# EAGLE board LogicShrimp-v2a (EAGLE 5.11)
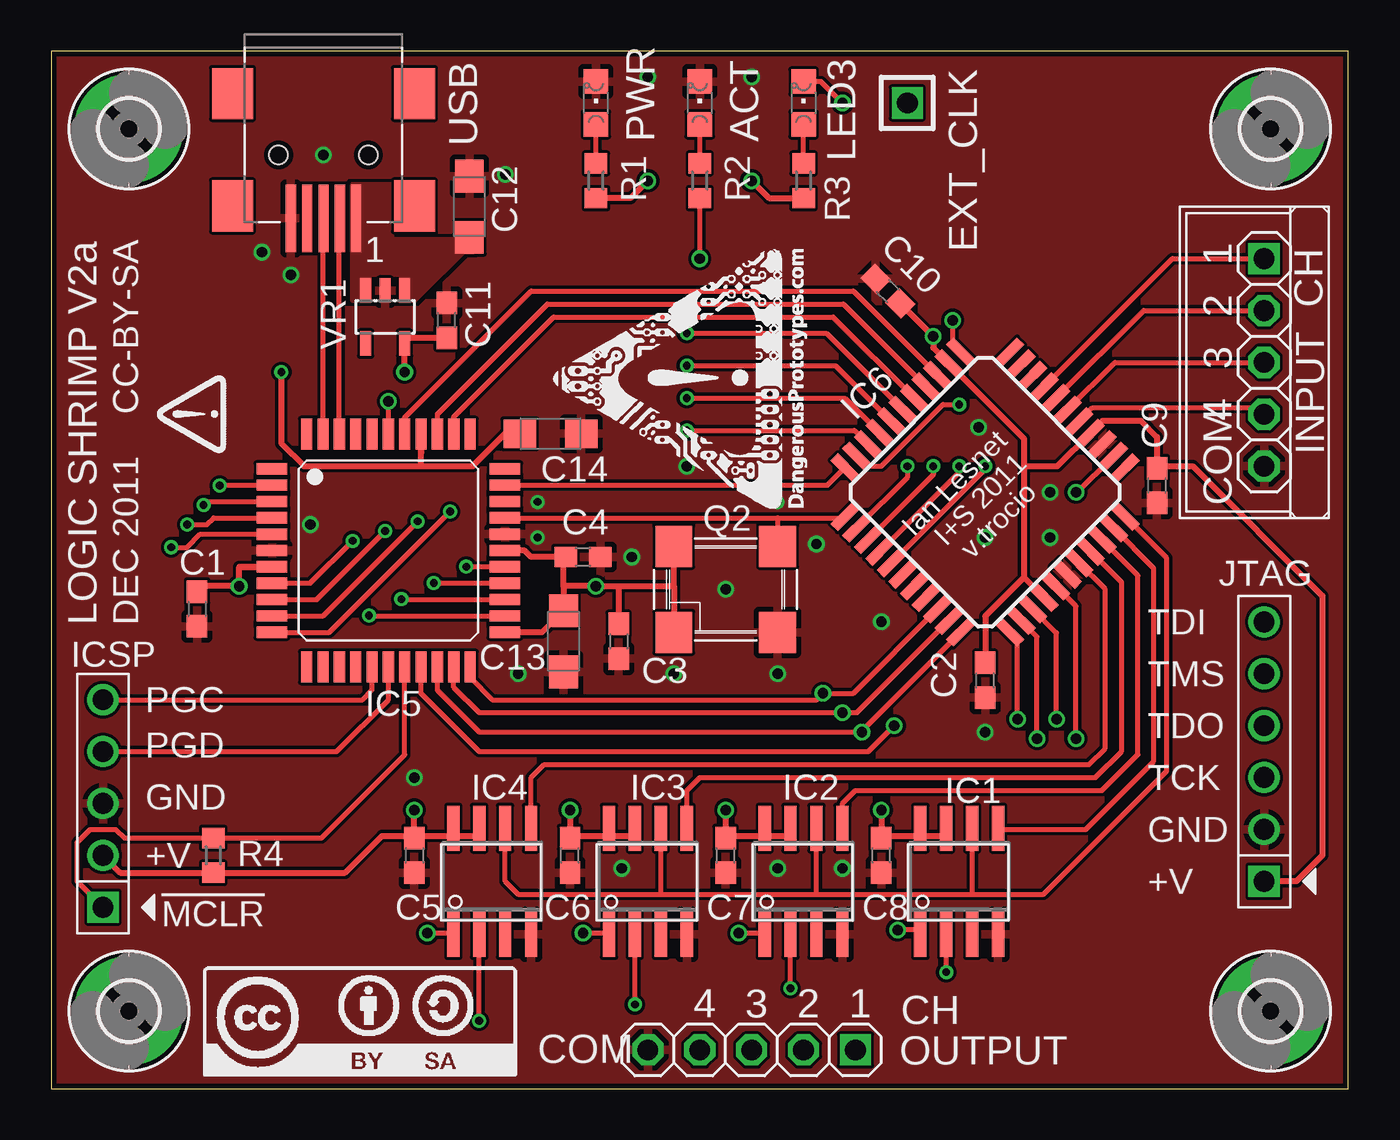
[diagram p0: board, top side]
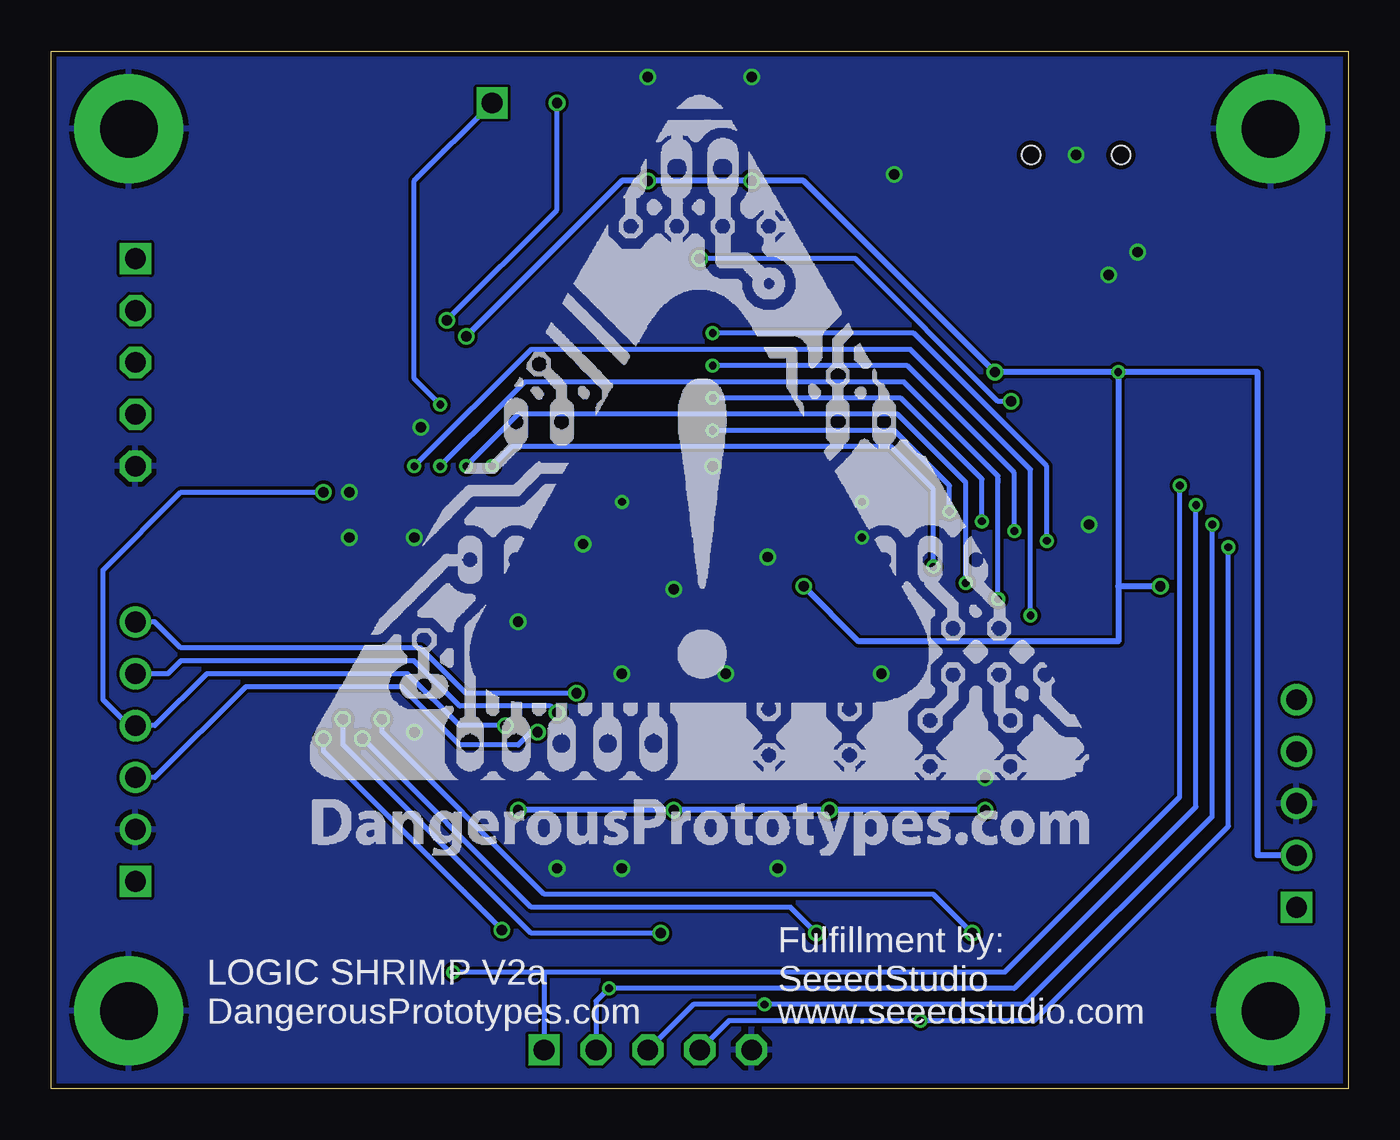
[diagram p1: board, bottom side, seen from below]

Size 63.5 x 50.8 mm. Coordinates in mm from the lower left corner, seen from the top.
Outline: 0,0 63.5,0 63.5,50.8 0,50.79 0,0
Copper layers (1*16): Top 0.035mm / dielectric 1.5mm / Bottom 0.035mm
Design rules "Fusion_eagle_rule_v1.1": minimum track width 6mil, minimum drill 12mil, track to track 6mil, track to pad 6mil, pad to pad 6mil, via to via 6mil, smd to smd 0mil, copper to edge 10mil, drill to drill 10mil, minimum pad ring 10mil, minimum via ring 6mil, stop-mask expansion 2mil, vias tented up to drill 100mil, thermal gap 10mil

## Footprints (pad centres in the part's own frame; a part is rotated, then mirrored left to right if it is on the bottom)
C0603 = smd 1.1 x 1: 1 -0.85,0; 2 0.85,0
SMC_A = smd 1.6 x 1.4: + -1.5,0; - 1.5,0
1X01 = drill 1.016 square: 1 0,0
2,8-PAD = drill 2.8 pad 5.334 round: B2,8 0,0
SOIC8 = smd 0.6 x 2.2: 1 -1.905,-2.6; 2 -0.635,-2.6; 3 0.635,-2.6; 4 1.905,-2.6; 5 1.905,2.6; 6 0.635,2.6; 7 -0.635,2.6; 8 -1.905,2.6
TQFP44 = smd 0.55 x 1.5: P1 -4,-5.7; P2 -3.2,-5.7; P3 -2.4,-5.7; P4 -1.6,-5.7; P5 -0.8,-5.7; P6 0,-5.7; P7 0.8,-5.7; P8 1.6,-5.7; P9 2.4,-5.7; P10 3.2,-5.7; P11 4,-5.7; P23 4,5.7; P24 3.2,5.7; P25 2.4,5.7; P26 1.6,5.7; P27 0.8,5.7; P28 0,5.7; P29 -0.8,5.7; P30 -1.6,5.7; P31 -2.4,5.7; P32 -3.2,5.7; P33 -4,5.7 | smd 1.5 x 0.55: P12 5.7,-4; P13 5.7,-3.2; P14 5.7,-2.4; P15 5.7,-1.6; P16 5.7,-0.8; P17 5.7,0; P18 5.7,0.8; P19 5.7,1.6; P20 5.7,2.4; P21 5.7,3.2; P22 5.7,4; P34 -5.7,4; P35 -5.7,3.2; P36 -5.7,2.4; P37 -5.7,1.6; P38 -5.7,0.8; P39 -5.7,0; P40 -5.7,-0.8; P41 -5.7,-1.6; P42 -5.7,-2.4; P43 -5.7,-3.2; P44 -5.7,-4
VQ44 = smd 1.5 x 0.5: 1 -5.7,4; 2 -5.7,3.2; 3 -5.7,2.4; 4 -5.7,1.6; 5 -5.7,0.8; 6 -5.7,0; 7 -5.7,-0.8; 8 -5.7,-1.6; 9 -5.7,-2.4; 10 -5.7,-3.2; 11 -5.7,-4; 23 5.7,-4; 24 5.7,-3.2; 25 5.7,-2.4; 26 5.7,-1.6; 27 5.7,-0.8; 28 5.7,0; 29 5.7,0.8; 30 5.7,1.6; 31 5.7,2.4; 32 5.7,3.2; 33 5.7,4 | smd 0.5 x 1.5: 12 -4,-5.7; 13 -3.2,-5.7; 14 -2.4,-5.7; 15 -1.6,-5.7; 16 -0.8,-5.7; 17 0,-5.7; 18 0.8,-5.7; 19 1.6,-5.7; 20 2.4,-5.7; 21 3.2,-5.7; 22 4,-5.7; 34 4,5.7; 35 3.2,5.7; 36 2.4,5.7; 37 1.6,5.7; 38 0.8,5.7; 39 0,5.7; 40 -0.8,5.7; 41 -1.6,5.7; 42 -2.4,5.7; 43 -3.2,5.7; 44 -4,5.7
HEADER_PRG_1X05 = drill 1.016 square: 1 -5.08,0 | drill 1.016 round: 2 -2.54,0; 3 0,0; 4 2.54,0; 5 5.08,0
1X05-S = drill 1.016 square: 1 -5.08,0 | drill 1.016 octagon: 2 -2.54,0; 3 0,0; 4 2.54,0; 5 5.08,0
HEADER_PRG_1X06 = drill 1.016 square: 1 -6.35,0 | drill 1.016 round: 2 -3.81,0; 3 -1.27,0; 4 1.27,0; 5 3.81,0; 6 6.35,0
LED-805 = smd 1.2 x 1.2: A 0,-1.05; C 0,1.05
OSCILLATOR_7X5_SMD = smd 1.8 x 2: 1 -2.54,-2.1; 2 2.54,-2.1; 3 2.54,2.1; 4 -2.54,2.1
R0603 = smd 1 x 1.1: 1 -0.85,0; 2 0.85,0
CONN_USB_MINI-B = smd 2 x 2.5: BODY@1 -4.45,2.5; BODY@2 4.45,2.5; BODY@3 4.45,-3; BODY@4 -4.45,-3 | smd 0.5 x 3.3: D+ 0,3.1; D- -0.8,3.1; GND 1.6,3.1; ID 0.8,3.1; VUSB -1.6,3.1 | hole 0.9: -2.2,0; 2.2,0
SOT-23-5 = smd 0.55 x 1.2: 1 -0.95,-1.3; 2 0,-1.3; 3 0.95,-1.3; 4 0.95,1.3; 5 -0.95,1.3

## Placement (x,y rotation side)
C1  0.1uF  [C0603]  7.14,23.5 270 top
C2  0.1uF  [C0603]  45.72,20 90 top
C3  0.1uF  [C0603]  27.78,21.91 270 top
C4  0.1uF  [C0603]  26.04,26.04 0 top
C5  0.1uF  [C0603]  17.78,11.43 270 top
C6  0.1uF  [C0603]  25.4,11.43 90 top
C7  0.1uF  [C0603]  33.02,11.43 90 top
C8  0.1uF  [C0603]  40.64,11.43 90 top
C9  0.1uF  [C0603]  54.13,29.53 90 top
C10  0.1uF  [C0603]  40.96,39.05 315 top
C11  1uF  [C0603]  19.37,37.62 90 top
C12  10uF  [SMC_A]  20.48,43.18 90 top
C13  10uF  [SMC_A]  25.08,21.91 270 top
C14  10uF  [SMC_A]  24.45,32.07 0 top
EXT_CLK  [1X01]  41.91,48.26 180 top
H1  MOUNT-PAD-ROUND2.8  [2,8-PAD]  3.81,46.99 0 top
H2  MOUNT-PAD-ROUND2.8  [2,8-PAD]  59.69,46.99 0 top
H3  MOUNT-PAD-ROUND2.8  [2,8-PAD]  59.69,3.81 0 top
H4  MOUNT-PAD-ROUND2.8  [2,8-PAD]  3.81,3.81 0 top
IC1  23K256  [SOIC8]  44.45,10.16 0 top
IC2  23K256  [SOIC8]  36.83,10.16 0 top
IC3  23K256  [SOIC8]  29.21,10.16 0 top
IC4  23K256  [SOIC8]  21.59,10.16 0 top
IC5  PIC18F44J50  [TQFP44]  16.51,26.35 270 top
IC6  XC9572VQ44  [VQ44]  45.72,29.21 45 top
ICSP  HEADER_PRG_PIC_ICSP  [HEADER_PRG_1X05]  2.54,13.97 90 top
INPUT  [1X05-S]  59.37,35.56 270 top
JTAG  HEADER_PRG_XILINX_JTAG6  [HEADER_PRG_1X06]  59.37,16.51 90 top
LED1  [LED-805]  26.67,48.26 0 top
LED2  [LED-805]  31.75,48.26 0 top
LED3  [LED-805]  36.83,48.26 0 top
OUTPUT  [1X05-S]  34.29,1.91 180 top
Q2  20Mhz  [OSCILLATOR_7X5_SMD]  33.02,24.45 0 top
R1  1.1K  [R0603]  26.67,44.45 90 top
R2  1.1K  [R0603]  31.75,44.45 90 top
R3  1.1K  [R0603]  36.83,44.45 90 top
R4  10K  [R0603]  7.94,11.43 270 top
U$1  [DP-LOGO_TOP]  8.57,31.11 90 top
U$2  [DP_LOGO_ART_0.5X0.5]  36.99,28.42 90 top
U$3  [DP_LOGO_ART_1.5X1.5]  50.8,11.43 0 bottom
U$4  [CC-BY-SA]  7.46,0.64 0 top
USB  CON-USB-MINI-BUSB1  [CONN_USB_MINI-B]  13.34,45.72 180 top
VR1  [SOT-23-5]  16.35,37.78 180 top

## Library data of the parts
C1 C2 C4 C9-C11 R1-R4 = resistor
C3 C5-C8 C12-C14 = rcl
EXT_CLK INPUT OUTPUT = pinhead-2
H1-H4 = holes
IC1-IC6 ICSP JTAG LED1-LED3 Q2 U$2-U$4 USB VR1 = dp_devices
U$1 = DP-logo

## Nets
+3V3: C1.1 C2.2 C3.1 C4.1 C5.1 C6.2 C7.2 C8.2 C9.2 C10.2 C11.1 C13.+ C14.+ IC1.7 IC1.8 IC2.7 IC2.8 IC3.7 IC3.8 IC4.7 IC4.8 IC5.P7 IC5.P23 IC5.P28 IC5.P37 IC6.15 IC6.26 IC6.35 ICSP.2 JTAG.1 Q2.1 Q2.4 R1.1 R3.1 R4.2 VR1.5
AUX_0: IC5.P35 IC6.38
BUFF_!OE: IC5.P36 IC6.37
CLK_GATE: IC5.P38 IC6.36
DI_0: IC6.30 INPUT.1
DI_1: IC6.29 INPUT.2
DI_2: IC6.28 INPUT.3
DI_3: IC6.27 INPUT.4
DO_0: IC1.2 IC5.P2 OUTPUT.1
DO_1: IC2.2 IC5.P3 OUTPUT.2
DO_2: IC3.2 IC5.P4 OUTPUT.3
DO_3: IC4.2 IC5.P5 OUTPUT.4
EXT_CLK: EXT_CLK.1 IC6.43
GND: C1.2 C2.1 C3.2 C4.2 C5.2 C6.1 C7.1 C8.1 C9.1 C10.1 C11.2 C12.- C13.- C14.- H1.B2,8 H2.B2,8 H3.B2,8 H4.B2,8 IC1.4 IC2.4 IC3.4 IC4.4 IC5.P6 IC5.P29 IC6.17 IC6.25 ICSP.3 INPUT.5 JTAG.2 LED1.C LED2.C OUTPUT.5 Q2.2 USB.GND VR1.2
ICSP_PGC: IC5.P16 ICSP.5
ICSP_PGD: IC5.P17 ICSP.4
JTAG_TCK: IC5.P20 IC6.11 JTAG.3
JTAG_TDI: IC5.P22 IC6.9 JTAG.6
JTAG_TDO: IC5.P19 IC6.24 JTAG.4
JTAG_TMS: IC5.P21 IC6.10 JTAG.5
LED: IC5.P39 R2.1
LED_CPLD: IC6.34 LED3.C
MCLR: IC5.P18 ICSP.1 R4.1
N$2: IC5.P31
N$7: LED1.A R1.2
N$8: LED2.A R2.2
N$10: LED3.A R3.2
OSC_CLK: IC5.P30 IC6.1 Q2.3
PIC_CS_0: IC5.P24 IC6.5
PIC_CS_1: IC5.P25 IC6.4
PIC_CS_2: IC5.P26 IC6.3
PIC_CS_3: IC5.P27 IC6.2
PIC_DI_0: IC5.P8 IC6.39
PIC_DI_1: IC5.P9 IC6.40
PIC_DI_2: IC5.P10 IC6.41
PIC_DI_3: IC5.P11 IC6.42
PIC_SCLK: IC5.P32 IC6.44
SRAM_CS_0: IC1.1 IC6.16
SRAM_CS_1: IC2.1 IC6.14
SRAM_CS_2: IC3.1 IC6.13
SRAM_CS_3: IC4.1 IC6.12
SRAM_DI_0: IC1.5 IC6.21
SRAM_DI_1: IC2.5 IC6.20
SRAM_DI_2: IC3.5 IC6.19
SRAM_DI_3: IC4.5 IC6.18
SRAM_SCLK: IC1.6 IC2.6 IC3.6 IC4.6 IC6.22
USB_D+: IC5.P43 USB.D+
USB_D-: IC5.P42 USB.D-
VUSB: C12.+ USB.VUSB VR1.1 VR1.3

## Tracks (layer width: path | path; a pad name or v marks a point on that pad's centre or on a via)
+3V3  (via drill 0.38, 0.51)
  Top 0.305: IC5.P28 23.18,26.35 23.5,26.04 C4.1 25.08,25.93 25.08,24.61 | 47.62,25.04 IC6.15 | 47.62,30.48 47.62,25.04 | 47.62,30.48 47.62,31.83 IC6.35 43.18,36.27 v43.18,36.83 | 47.62,30.48 49.25,30.48 IC6.26 51.48,32.7 53.34,32.7 54.13,31.91 C9.2 54.24,30.48 55.88,30.48 62.23,24.13 62.23,11.43 60.96,10.16 JTAG.1 | ICSP.2 3.39,10.58 R4.2 14.39,10.58 16.19,12.38 17.68,12.38 C5.1 17.78,12.38 | 20.95,13.65 20.85,13.55 20.95,13.45 IC4.7 20.95,12.38 19.68,12.38 | 17.78,12.38 v17.78,13.65 | v33.02,13.65 33.02,12.38 | v40.64,13.65 C8.2 40.64,12.38 42.55,12.38 | v25.4,13.65 25.4,12.38 | 33.02,12.38 C7.2 | 33.02,12.38 34.92,12.38 | 34.92,12.38 36.2,12.38 IC2.7 | 34.92,12.38 IC2.8 | 25.4,12.38 C6.2 | 25.4,12.38 27.3,12.38 | 27.3,12.38 28.57,12.38 IC3.7 | 27.3,12.38 IC3.8 | 17.78,12.38 19.68,12.38 | 19.68,12.38 IC4.8 | C2.2 45.72,23.14 47.62,25.04 | IC5.P37 18.1,32.04 | 30.48,24.61 Q2.4 | IC1.7 43.81,12.38 42.55,12.38 | 42.55,12.38 IC1.8 | v43.18,36.83 C10.2 | v43.18,36.83 | 25.08,24.61 C13.+ 24.03,22.35 IC5.P23 | 25.08,24.61 v26.67,24.61 27.78,24.61 | 30.48,24.61 Q2.1 | 27.78,24.61 30.48,24.61 | 27.78,24.61 C3.1 | IC5.P37 18.11,31.1 | C11.1 17.3,36.77 VR1.5 v17.3,35.08 | 18.11,30.48 IC5.P37 | 18.11,30.48 12.38,30.48 11.27,31.59 v11.27,35.08 | 18.11,30.48 20.64,30.48 22.23,32.07 C14.+ | 9.21,25.55 IC5.P7 9.21,25.55 v9.21,24.61 7.41,24.61 C1.1 | R3.1 35.14,43.6 v34.29,44.45 | R1.1 28.36,43.6 v29.21,44.45
  Bottom 0.305: ICSP.2 4.45,11.43 4.45,35.08 v11.27,35.08 | v17.78,13.65 v25.4,13.65 v33.02,13.65 v40.64,13.65 | v11.27,35.08 v17.3,35.08 | v11.27,35.08 11.27,24.61 | 11.27,24.61 11.27,21.91 23.97,21.91 v26.67,24.61 | 11.27,24.61 v9.21,24.61 | v17.3,35.08 | v17.3,35.08 26.67,44.45 v29.21,44.45 v34.29,44.45 35.56,44.45 v43.18,36.83
AUX_0
  Top 0.254: IC5.P35 19.71,32.89 24.61,37.78 38.28,37.78 IC6.38
BUFF_!OE
  Top 0.254: IC6.37 38.77,38.42 24.29,38.42 18.91,33.04 IC5.P36
CLK_GATE
  Top 0.254: IC6.36 39.27,39.05 23.5,39.05 17.31,32.87 IC5.P38
DI_0
  Top 0.254: INPUT.1 54.89,40.64 IC6.30
DI_1
  Top 0.254: INPUT.2 53.48,38.1 IC6.29
DI_2
  Top 0.254: INPUT.3 52.07,35.56 IC6.28
DI_3
  Top 0.254: IC6.27 50.98,33.34 59.05,33.34 INPUT.4
DO_0  (via drill 0.38)
  Top 0.254: v43.81,5.71 IC1.2 | IC5.P2 8.28,29.55 v8.26,29.53
  Bottom 0.254: 39.37,5.71 v43.81,5.71 | v8.26,29.53 8.26,14.29 16.83,5.71 39.37,5.71 | 39.37,5.71 OUTPUT.1
DO_1  (via drill 0.38)
  Top 0.254: v36.2,4.92 IC2.2 | IC5.P3 7.64,28.75 v7.46,28.57
  Bottom 0.254: v7.46,28.57 7.46,13.81 16.35,4.92 v36.2,4.92 | v36.2,4.92 | OUTPUT.2 36.83,4.29 v36.2,4.92
DO_2  (via drill 0.38)
  Top 0.254: v28.57,4.13 IC3.2 | IC5.P4 7.95,27.95 7.62,27.62 v6.67,27.62
  Bottom 0.254: v6.67,27.62 6.67,13.34 15.88,4.13 v28.57,4.13 32.07,4.13 OUTPUT.3
DO_3  (via drill 0.38)
  Top 0.254: v20.95,3.33 IC4.2 | IC5.P5 7.31,27.15 6.67,26.51 v5.87,26.51
  Bottom 0.254: v5.87,26.51 5.87,12.86 15.4,3.33 v20.95,3.33 30.32,3.33 OUTPUT.4
EXT_CLK  (via drill 0.38)
  Top 0.254: IC6.43 39.92,30.48 40.64,30.48 43.66,33.5 v44.45,33.5
  Bottom 0.254: v44.45,33.5 45.72,34.77 45.72,44.45 EXT_CLK.1
GND  (via drill 0.38, 0.51)
  other vias: 35.56,28.73 23.81,28.73 33.02,24.45 23.81,26.99 31.11,30.48 29.21,49.53 13.34,45.72 11.75,39.85 27.94,10.79 35.56,10.79 38.73,10.79 17.78,15.24 48.9,29.21 45.72,17.46 48.9,26.99 30.48,20.32 28.42,26.04 35.56,20.32 37.47,26.67 40.64,22.86 45.72,26.99 45.4,32.38 22.86,20.32 12.7,27.62 10.32,40.96 22.23,44.77 34.29,49.53
  pour Top (rank 6): 0,50.8 63.5,50.8 63.5,0 0,0
  pour Bottom (rank 6): 0,50.8 63.5,50.8 63.5,0 0,0
ICSP_PGC
  Top 0.254: IC5.P16 15.71,19.52 15.24,19.05 ICSP.5
ICSP_PGD
  Top 0.254: IC5.P17 16.51,19.05 13.97,16.51 ICSP.4
JTAG_TCK  (via drill 0.51)
  Top 0.254: IC5.P20 18.91,19.51 20.95,17.46 v39.69,17.46 39.95,17.78 IC6.11
  Bottom 0.254: JTAG.3 58.42,15.24 53.98,19.68 46.35,19.68 43.5,16.83 40.64,16.83 40.01,17.46 v39.69,17.46
JTAG_TDI  (via drill 0.51)
  Top 0.254: IC5.P22 20.51,20.13 21.59,19.05 37.47,19.05 v37.78,19.37 39.27,19.37 IC6.9
  Bottom 0.254: JTAG.6 58.42,22.86 57.15,21.59 45.4,21.59 43.18,19.37 v37.78,19.37
JTAG_TDO  (via drill 0.51)
  Top 0.254: IC5.P19 18.11,19.36 20.95,16.51 40.01,16.51 v41.27,17.78 | IC6.24 50.16,29.13 v50.16,29.21
  Bottom 0.254: v50.16,29.21 57.15,29.21 60.96,25.4 60.96,19.05 59.69,17.78 JTAG.4 58.42,17.78 55.88,20.32 46.04,20.32 43.5,17.78 v41.27,17.78
JTAG_TMS  (via drill 0.51)
  Top 0.254: IC5.P21 19.71,19.66 20.95,18.41 v38.73,18.41 39.45,18.41 IC6.10
  Bottom 0.254: JTAG.5 57.78,20.32 57.15,20.95 45.72,20.95 43.5,18.73 39.05,18.73 v38.73,18.41
LED  (via drill 0.51)
  Top 0.254: v31.75,40.64 R2.1 | IC5.P39 v16.51,33.66
  Bottom 0.254: v16.51,33.66 17.14,33.66 24.13,40.64 v31.75,40.64
LED_CPLD  (via drill 0.51)
  Top 0.254: LED3.C 37.69,49.31 v38.73,48.26 | 44.58,36.07 IC6.34 44.13,36.45 v44.13,37.62
  Bottom 0.254: v44.13,37.62 38.73,43.02 v38.73,48.26
MCLR
  Top 0.254: ICSP.1 1.27,10.16 1.27,12.06 1.91,12.7 3.17,12.7 3.6,12.28 R4.1 13.23,12.28 13.81,12.86 14.29,13.34 17.31,16.36 IC5.P18
N$7
  Top 0.254: R1.2 LED1.A
N$8
  Top 0.254: R2.2 LED2.A
N$10
  Top 0.254: R3.2 LED3.A
OSC_CLK
  Top 0.254: IC6.1 38.86,27.95 35.56,27.95 | IC5.P30 35.56,27.95 | 35.56,27.95 Q2.3
PIC_CS_0  (via drill 0.38)
  Top 0.254: IC6.5 45.72,30.34 v45.72,30.48 | IC5.P24 15.58,23.15 v15.56,23.18
  Bottom 0.254: v45.72,30.48 40.01,36.2 21.43,36.2 15.56,30.32 v15.56,23.18
PIC_CS_1  (via drill 0.38)
  Top 0.254: IC6.4 44.45,30.2 v44.45,30.48 | IC5.P25 17.16,23.95 v17.14,23.97
  Bottom 0.254: v44.45,30.48 | 41.43,33.5 v44.45,30.48 | 41.43,33.5 | 41.43,33.5 40.32,34.61 21.75,34.61 17.14,30 17.14,29.84 | 17.14,29.84 17.14,29.69 | v17.14,23.97 17.14,29.84
PIC_CS_2  (via drill 0.38)
  Top 0.254: IC6.3 43.18,30.06 v43.18,30.48 | IC5.P26 18.75,24.75 v18.73,24.77
  Bottom 0.254: v43.18,30.48 | v18.73,24.77 18.73,29.69 22.07,33.02 40.64,33.02 v43.18,30.48
PIC_CS_3  (via drill 0.38)
  Top 0.254: IC6.2 41.91,29.93 v41.91,30.48 | IC5.P27 20.64,25.55 v20.32,25.56
  Bottom 0.254: v41.91,30.48 40.96,31.43 22.38,31.43 20.32,29.37 v20.32,25.56
PIC_DI_0  (via drill 0.38)
  Top 0.254: IC6.39 37.94,36.99 v31.11,36.99 | IC5.P8 12.69,24.75 v14.76,26.83
  Bottom 0.254: v14.76,26.83 14.76,30.48 21.27,36.99 v31.11,36.99
PIC_DI_1  (via drill 0.38)
  Top 0.254: IC6.40 38.4,35.4 v31.11,35.4 | IC5.P9 13,23.95 v16.35,27.3
  Bottom 0.254: v16.35,27.3 16.35,30.16 21.59,35.4 v31.11,35.4
PIC_DI_2  (via drill 0.38)
  Top 0.254: v31.11,33.81 38.85,33.81 IC6.41 | IC5.P10 13.31,23.15 v17.94,27.78
  Bottom 0.254: v17.94,27.78 17.94,29.84 21.91,33.81 v31.11,33.81
PIC_DI_3  (via drill 0.38)
  Top 0.254: v31.11,32.23 39.31,32.23 IC6.42 | IC5.P11 13.62,22.35 18.57,27.3 | 18.57,27.3 | 18.57,27.3 v19.53,28.26
  Bottom 0.254: v19.53,28.26 19.53,29.53 22.23,32.23 v31.11,32.23
PIC_SCLK
  Top 0.254: IC5.P32 38,29.55 IC6.44
SRAM_CS_0  (via drill 0.51)
  Top 0.254: v50.16,17.14 50.16,23.63 IC6.16 | v41.43,7.78 42.55,7.78 IC1.1
  Top 0.305: IC1.1 42.55,7.62
  Bottom 0.254: v41.43,7.78 | v41.43,7.78 50.16,16.51 v50.16,17.14
SRAM_CS_1  (via drill 0.51)
  Top 0.254: v49.21,18.1 49.21,22.32 IC6.14 | v33.66,7.62 34.87,7.62 IC2.1
  Bottom 0.254: v33.66,7.62 40.01,7.62 49.21,16.83 v49.21,18.1
SRAM_CS_2  (via drill 0.51)
  Top 0.254: IC6.13 48.26,22.14 v48.26,17.14 | v26.04,7.62 27.25,7.62 IC3.1
  Bottom 0.254: v26.04,7.62 27.3,8.89 40.01,8.89 v48.26,17.14
SRAM_CS_3  (via drill 0.51)
  Top 0.254: v47.31,18.1 47.31,21.96 IC6.12 | v18.41,7.62 19.62,7.62 IC4.1
  Bottom 0.254: v18.41,7.62 20.32,9.53 39.37,9.53 47.31,17.46 v47.31,18.1
SRAM_DI_0
  Top 0.254: 46.38,12.79 IC1.5 46.41,12.7 50.64,12.7 53.98,16.03 53.98,25.48 IC6.21
SRAM_DI_1
  Top 0.254: IC6.20 53.2,25.12 53.2,16.37 51.44,14.61 39.37,14.61 38.73,13.97 IC2.5
SRAM_DI_2
  Top 0.254: IC6.19 52.4,24.79 52.4,16.52 51.12,15.24 31.75,15.24 31.11,14.61 IC3.5
SRAM_DI_3
  Top 0.254: IC6.18 51.6,24.46 51.6,16.68 50.8,15.88 24.13,15.88 23.5,15.24 IC4.5
SRAM_SCLK
  Top 0.254: 29.84,9.53 22.86,9.53 22.23,10.16 IC4.6 | 29.84,9.53 IC3.6 | 29.84,9.53 37.47,9.53 | 37.47,9.53 IC2.6 | 37.47,9.53 45.09,9.53 | 45.09,9.53 IC1.6 | IC6.22 54.61,25.98 54.61,15.56 48.58,9.53 45.09,9.53
USB_D+
  Top 0.254: IC5.P43 13.31,42.59 USB.D+
USB_D-
  Top 0.254: IC5.P42 14.11,42.59 USB.D-
VUSB
  pour Top (no thermals): 14.76,44.29 16.67,44.29 16.67,41.59 20.64,41.59 20.64,40.96 20.16,40.96 18.1,38.89 17.78,38.58 17.14,38.58 17.14,39.85 15.56,39.85 15.56,38.58 14.76,38.58

## Text on the board
tPlace: PWR | ACT | 1 | 2 | CH | 3 | CC-BY-SA | 4 | COM | LOGIC SHRIMP V2a | DEC 2011 | TDI | TMS | PGC | TDO | PGD | TCK | GND | GND | +V | +V | !MCLR | 4 | 3 | 2 | 1 | CH | COM
tNames: Ian Lesnet | I+S 2011 | v.trocio
bNames: Fulfillment by: | SeeedStudio | LOGIC SHRIMP V2a | www.seeedstudio.com | DangerousPrototypes.com
Reference: LOGIC SHRIMP V2.0 | CC-BY-SA | Ian Lesnet 2011 | http://dangerousprototypes.com